# EAGLE board SOFTENG REACTIVE LIGHT (EAGLE 9.7.0)

Size 301.3 x 111.68 mm. Coordinates in mm from the lower left corner, seen from the top.
Outline: 0,0 301.3,0 301.3,111.69 0,111.69 0,0
Copper layers (1*16): Top 0.035mm / dielectric 1.5mm / Bottom 0.035mm
Design rules "default": minimum track width 6mil, minimum drill 0.35mm, track to track 6mil, track to pad 6mil, pad to pad 6mil, via to via 6mil, smd to smd 6mil, copper to edge 40mil, drill to drill 6mil, minimum pad ring 10mil, minimum via ring 8mil, stop-mask expansion 4mil, vias tented up to drill 0mil, thermal gap 10mil

## Footprints (pad centres in the part's own frame; a part is rotated, then mirrored left to right if it is on the bottom)
LEDRD254W60D565H860B = drill 0.981 pad 1.581: 1 -1.27,0; 2 1.27,0
28027 = drill 1.016 long: 1 -2.54,0; 2 0,0; 3 2.54,0
GL5528 = drill 0.8 pad 1.4: 1 -1.702,0; 2 1.702,0
RESAD1016W63L850D250B = drill 0.83 pad 1.43: 1 -5.08,0; 2 5.08,0
1X02 = drill 1.016 long: 1 -1.27,0; 2 1.27,0
ARDUINO-UNO-R3-SHIELD = drill 1.016 pad 1.88: 3.3V 24.13,-2.54; 5V 24.13,0; A0 24.13,12.7; A1 24.13,15.24; A2 24.13,17.78; A3 24.13,20.32; A4 24.13,22.86; A5 24.13,25.4; AREF -24.13,-13.97; D2 -24.13,20.32; D3 -24.13,17.78; D4 -24.13,15.24; D5 -24.13,12.7; D6 -24.13,10.16; D7 -24.13,7.62; D8 -24.13,3.81; D9 -24.13,1.27; D10 -24.13,-1.27; D11 -24.13,-3.81; D12 -24.13,-6.35; D13 -24.13,-8.89; GND@0 24.13,2.54; GND@1 24.13,5.08; GND@2 -24.13,-11.43; IOREF 24.13,-7.62; NC 24.13,-10.16; RES 24.13,-5.08; RX -24.13,25.4; SCL -24.13,-19.05; SDA -24.13,-16.51; TX -24.13,22.86; VIN 24.13,7.62
LCD-I2C = drill 1.016 long: 1 -19.05,-5.08; 2 -19.05,-7.62; 3 -19.05,-10.16; 4 -19.05,-12.7

## Placement (x,y rotation side)
D1  RED  [LEDRD254W60D565H860B]  138.28,8.05 180 top
D2  RED  [LEDRD254W60D565H860B]  107.8,8.05 180 top
D3  RED  [LEDRD254W60D565H860B]  168.76,8.05 180 top
D4  RED  [LEDRD254W60D565H860B]  201.78,8.05 180 top
PIR1  PIR-SENSOR_28027  [28027]  154.87,102.71 0 top
R1  PHOTOCELL_GL5528  [GL5528]  112.96,72.23 0 top
R2  330  [RESAD1016W63L850D250B]  106.61,95.09 90 top
R3  1k  [RESAD1016W63L850D250B]  114.23,59.53 90 top
R4  FORCE-SENSOR  [1X02]  123.12,64.61 0 top
R5  220  [RESAD1016W63L850D250B]  238.69,102.71 90 top
R6  220  [RESAD1016W63L850D250B]  106.53,23.29 90 top
R7  220  [RESAD1016W63L850D250B]  137.01,23.29 90 top
R8  220  [RESAD1016W63L850D250B]  167.49,23.29 90 top
R9  220  [RESAD1016W63L850D250B]  200.51,23.29 90 top
R14  1k  [RESAD1016W63L850D250B]  124.39,59.53 90 top
U1  ARDUINO-UNO-R3-SHIELD  [ARDUINO-UNO-R3-SHIELD]  47.88,78.06 270 top
U3  LCD-16X2-I2CSUNFOUNDER-IIC  [LCD-I2C]  245.68,89.89 0 top

## Library data of the parts
D1-D4 = Tinkercad; CATEGORY: Opto-Electronic; SUB-CATEGORY: LED; VALUE: LED_RED
PIR1 R1-R9 R14 U1 U3 = Tinkercad

## Nets
D1_C: D1.2 R7.1
D2_C: D2.2 R6.1
D3_C: D3.2 R8.1
D4_C: D4.2 R9.1
U1_A0: R4.2 R14.2 U1.A0
U1_A2: R1.2 R3.2 U1.A2
U1_A4: PIR1.2 PIR1.3 R1.1 R2.2 R3.1 R4.1 R5.1 R6.2 R7.2 R8.2 R9.2 R14.1 U1.5V U1.A4 U1.GND@0 U1.GND@1 U1.GND@2 U3.1 U3.2 U3.3
U1_A5: U1.A5 U3.4
U1_D12: PIR1.1 U1.D12
U1_D13: D1.1 D2.1 D3.1 D4.1 U1.D13

## Tracks (layer width: path | path; a pad name or v marks a point on that pad's centre or on a via)
D1_C  (1 unrouted)
D2_C  (1 unrouted)
D3_C  (1 unrouted)
D4_C  (1 unrouted)
U1_A0  (2 unrouted)
U1_A2  (2 unrouted)
U1_A4  (19 unrouted)
U1_A5  (1 unrouted)
U1_D12  (1 unrouted)
U1_D13  (4 unrouted)